# Altium PCB Sensor.PcbDoc
Units mil, origin at the board's own origin, x right, y up, seen from the top; angles counter-clockwise.
Board outline 6000 x 4000 mil, 2 copper layers (Top Layer, Bottom Layer); 43 components, 41 nets, 155 pads, 2 vias.
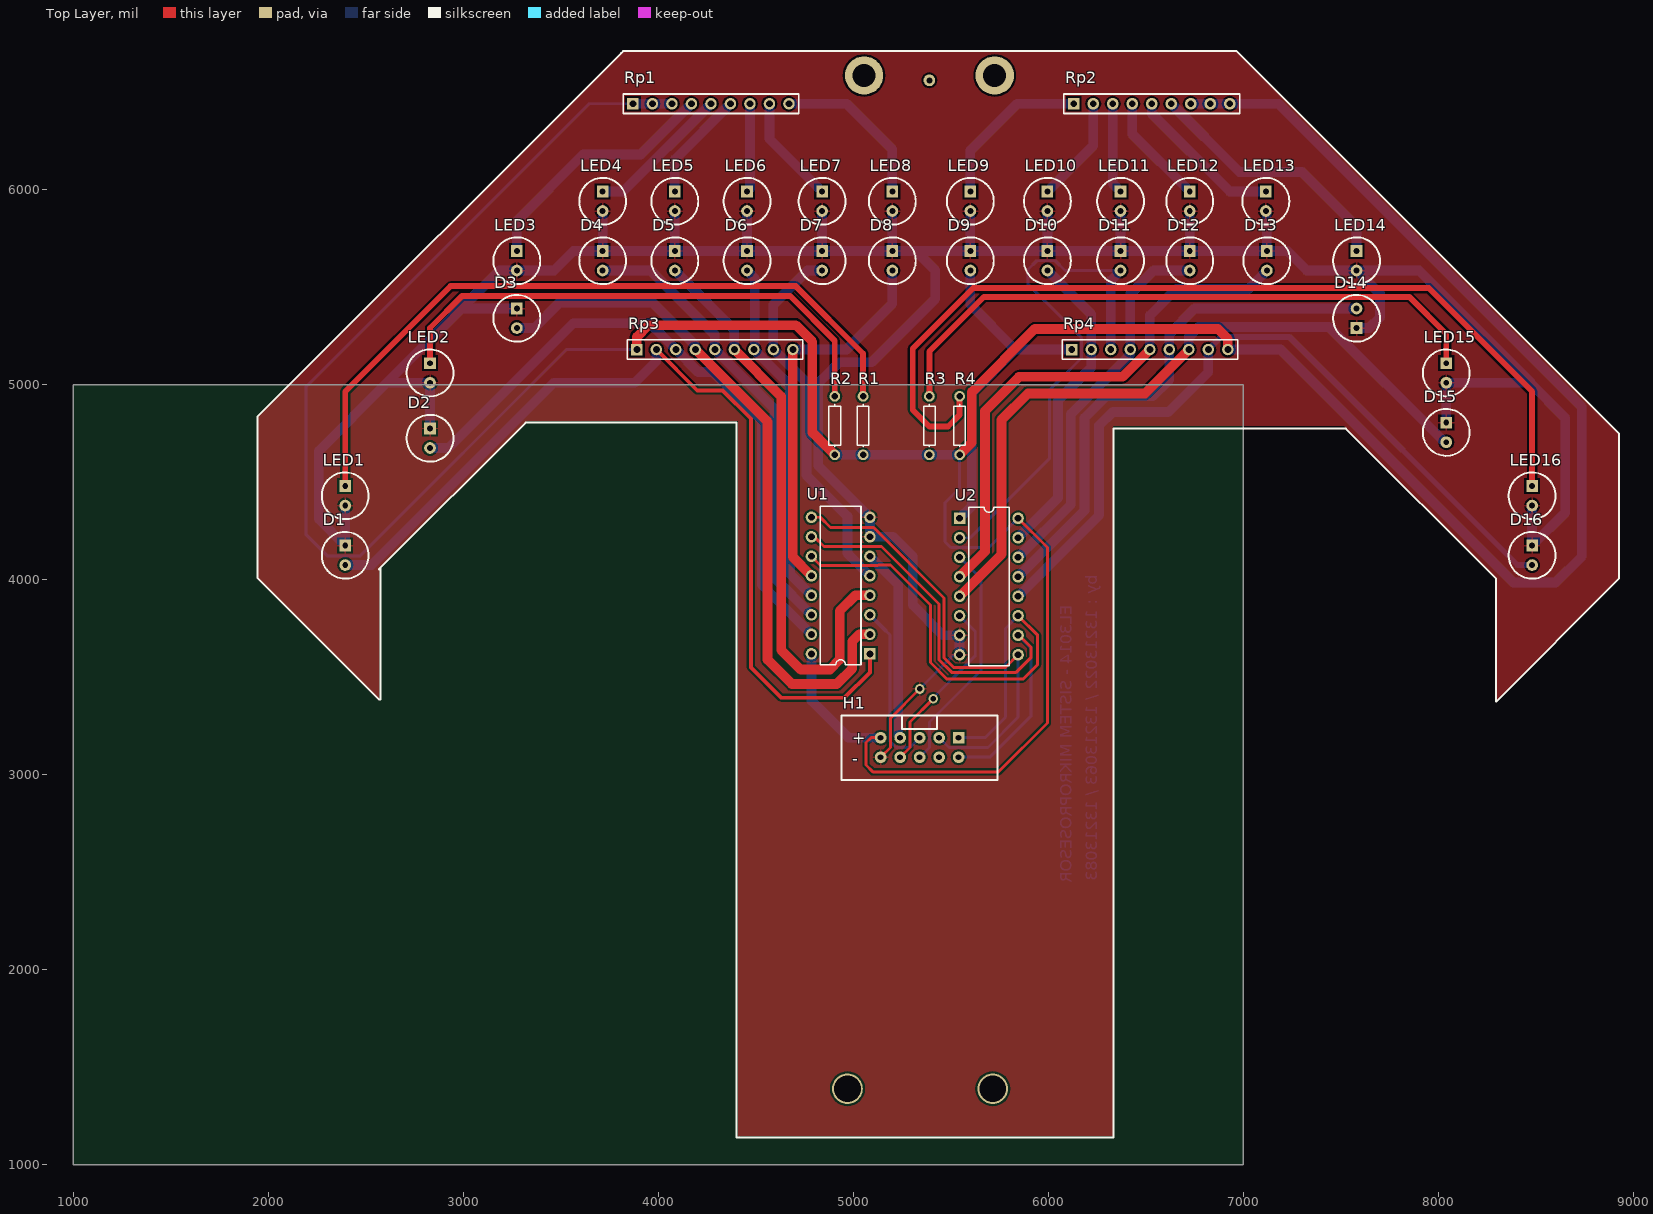
[diagram p0: Top Layer view]
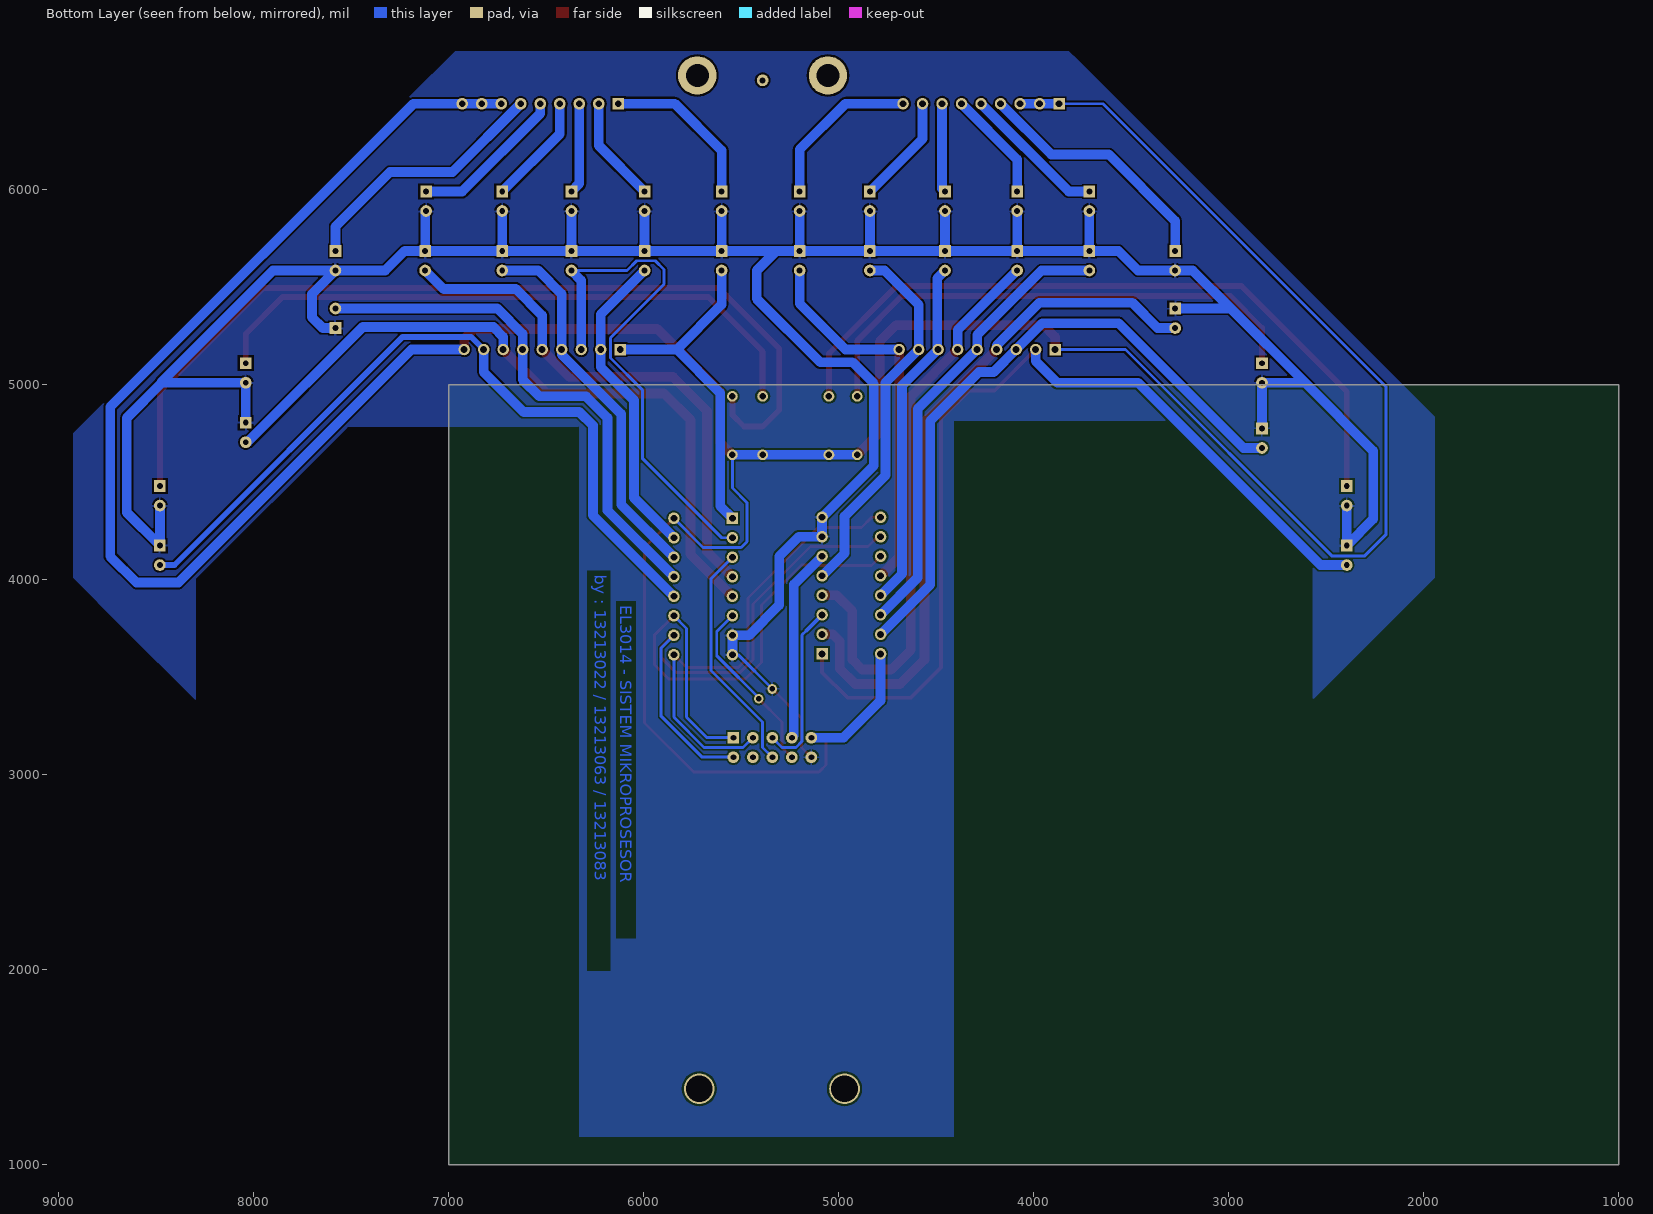
[diagram p1: Bottom Layer view, seen from below]

## Layer stack, top to bottom
Top Solder: solder mask 0.4, Solder Resist, Dk 3.5
Top Layer: signal copper 1.4
Dielectric 1: dielectric 12.6, FR-4, Dk 4.8
Bottom Layer: signal copper 1.4
Bottom Solder: solder mask 0.4, Solder Resist, Dk 3.5

## Board outline
1000,1000 7000,1000 7000,5000 1000,5000

## Design rules (kind name [scope] priority, off if disabled: settings)
Clearance Jalur [All] p1: gap=10
PolygonConnect [All] p1: connectstyle=Relief reliefconductorwidth=10 reliefentries=4 polygonreliefangle="90 Angle" airgapwidth=10
RoomDefinition Sensor [InComponentClass('Sensor')] p1: confinementstyle=ConfineIn formatcopy=TRUE lockcomponents=FALSE outline 1730,880 9160,880 9160,6790 1730,6790
RoutingVias [All] p1: holewidth=28 width=50 viastyle="Through Hole" minholewidth=28 minwidth=50 maxholewidth=28 maxwidth=50
SolderMaskExpansion [All] p1: expansion=4
Width Lebar [OnLayer()] p1: maxlimit=80 minlimit=10 preferedwidth=15
30 further rules are at their usual default settings.

## Components (designator, comment, footprint, x,y, rotation, side; value= is the part's Value field where it differs from the comment)
D1 "LED sedang" "LED sedang" 2395,3975 r270 top
D2 "LED sedang" "LED sedang" 2830,4575 r270 top
D3 "LED sedang" "LED sedang" 3275,5190 r270 top
D4 "LED sedang" "LED sedang" 3715,5485 r270 top
D5 "LED sedang" "LED sedang" 4085,5485 r270 top
D6 "LED sedang" "LED sedang" 4455,5485 r270 top
D7 "LED sedang" "LED sedang" 4840,5485 r270 top
D8 "LED sedang" "LED sedang" 5200,5485 r270 top
D9 "LED sedang" "LED sedang" 5600,5485 r270 top
D10 "LED sedang" "LED sedang" 5995,5485 r270 top
D11 "LED sedang" "LED sedang" 6370,5485 r270 top
D12 "LED sedang" "LED sedang" 6725,5485 r270 top
D13 "LED sedang" "LED sedang" 7120,5485 r270 top
D14 "LED sedang" "LED sedang" 7580,5490.13 r90 top
D15 "LED sedang" "LED sedang" 8040,4605 r270 top
D16 "LED sedang" "LED sedang" 8480,3975 r270 top
H1 "Header Soket male 10 pin" "Header Soket male 10 pin" 5440,3290 r180 top
LED1 "LED sedang" "LED sedang" 2395,4280 r270 top
LED2 "LED sedang" "LED sedang" 2830,4910 r270 top
LED3 "LED sedang" "LED sedang" 3275,5485 r270 top
LED4 "LED sedang" "LED sedang" 3715,5790 r270 top
LED5 "LED sedang" "LED sedang" 4085,5790 r270 top
LED6 "LED sedang" "LED sedang" 4455,5790 r270 top
LED7 "LED sedang" "LED sedang" 4840,5790 r270 top
LED8 "LED sedang" "LED sedang" 5200,5790 r270 top
LED9 "LED sedang" "LED sedang" 5600,5790 r270 top
LED10 "LED sedang" "LED sedang" 5995,5790 r270 top
LED11 "LED sedang" "LED sedang" 6370,5790 r270 top
LED12 "LED sedang" "LED sedang" 6725,5790 r270 top
LED13 "LED sedang" "LED sedang" 7115,5790 r270 top
LED14 "LED sedang" "LED sedang" 7580,5485 r270 top
LED15 "LED sedang" "LED sedang" 8040,4910 r270 top
LED16 "LED sedang" "LED sedang" 8480,4280 r270 top
R1 "Res1" AXIAL-0.3 5050,4790 r270 top
R2 "Res1" AXIAL-0.3 4905,4790 r270 top
R3 "Res1" AXIAL-0.3 5390,4790 r270 top
R4 "Res1" AXIAL-0.3 5545,4790 r270 top
Rp1 "Header 9" HDR1X9 3870,6440 r0 top
Rp2 "Header 9" HDR1X9 6130,6440 r0 top
Rp3 "Header 9" HDR1X9 3890,5180 r0 top
Rp4 "Header 9" HDR1X9 6120,5180 r0 top
U1 "HCC4051BF" DIP16 4935,3970 r90 top
U2 "HCC4051BF" DIP16 5695,3965 r270 top

## Footprints (in the part's own frame and the unit in brackets; to place one, negate y for a bottom-side part, rotate by r counter-clockwise, add the part's x,y. Pads: shape width x height; smd on the part's side, far side on the other; paste and mask are expansions set on the pad)
AXIAL-0.3 [mm] "Axial Device, Thru-Hole; 2 Leads; 0.3 in Pin Spacing"
  round 1.4 hole 0.85: 1(-3.81,0) 2(3.81,0)
  silkscreen extent -2.77,-0.76 2.77,0.76
DIP16 [mm] "DIP; 16 Leads; Row Spacing 7.62 mm; Pitch 2.54 mm"
  rect 1.5x1.5 hole 0.9: 1(-8.89,-3.81)
  round 1.5 hole 0.9: 2(-6.35,-3.81) 3(-3.81,-3.81) 4(-1.27,-3.81) 5(1.27,-3.81) 6(3.81,-3.81) 7(6.35,-3.81) 8(8.89,-3.81) 9(8.89,3.81) 10(6.35,3.81) 11(3.81,3.81) 12(1.27,3.81) 13(-1.27,3.81) 14(-3.81,3.81) 15(-6.35,3.81) 16(-8.89,3.81)
  silkscreen extent -10.3,-2.65 10.3,2.65
HDR1X9 [mm] "Connector; Header; 9 Position"
  rect 1.5x1.5 hole 0.9: 1(0,0)
  round 1.5 hole 0.9: 2(2.54,0) 3(5.08,0) 4(7.62,0) 5(10.16,0) 6(12.7,0) 7(15.24,0) 8(17.78,0) 9(20.32,0)
  silkscreen extent -1.27,-1.27 21.59,1.27
"Header Soket male 10 pin" [mil]
  rect 60x60 hole 30: 1(-100,100)
  round 60 hole 30: 2(-100,200) 3(0,100) 4(0,200) 5(100,100) 6(100,200) 7(200,100) 8(200,200) 9(300,100) 10(300,200)
  silkscreen extent -300,-14 500,316
"LED sedang" [mil]
  rect 60x60 hole 30: 1(-200,0)
  round 60 hole 30: 2(-100,0)
  silkscreen extent -270,-120 -30,120

## Part data
R1 R2 R3 R4: "Resistor"
Rp1 Rp2 Rp3 Rp4: "Header, 9-Pin"
U1 U2: "Analog Multiplexer/Demultiplexer"

## Free pads (board coordinates)
  round 60 hole 30: 1(5390,6560)
  round 157.48 hole 137.8: 2(5715,1390) 4(4970,1390)
  round 196.85 hole 118.11: 2(5725,6585) 3(5055,6585)

## Via types
v1: diameter 50, hole 28, Top Layer to Bottom Layer, 2 vias

## Nets (pads, with @x,y where several pads share a name; then routed paths per layer and width w, separated by ;. In a path a pad name is that pad's centre, name@x,y a point inside that pad or via, vN(x,y) a via of type N, cw(c..) or ccw(c..) an arc to the next point about the centre after c; other vN are vias at no path point)
A: H1.1 U1.11 U2.11 | length 2748.3
  Top Layer w15: U1.11 4832.03,4072.97 5127.03,4072.97 5129.06,4075 5190,4075 5395,3870 5395,3575 5480,3490 5870,3490 5945,3565 5945,3715 U2.11
  Bottom Layer w15: H1.1 5675,3190 5780,3295 5780,3750 U2.11
B: H1.2 U1.10 U2.10 | length 2654.9
  Top Layer w15: U1.10 4800,4220 4850,4170 5145,4170 5440,3875 5440,3589.64 5504.64,3525 5835,3525 5910,3600 5910,3655 5850,3715 U2.10
  Bottom Layer w15: H1.2 5700,3090 5910,3300 5910,3650 U2.10
C: H1.3 U1.9 U2.9 | length 2395.3
  Top Layer w15: U1.9 4830,4320 4882.97,4267.03 5104.48,4267.03 5465,3906.51 5465,3600 5515,3550 5780,3550 U2.9
  Bottom Layer w15: H1.3 5490,3140 5690,3140 5845,3295 U2.9
GND: D1.1 D2.1 D3.1 D4.1 D5.1 D6.1 D7.1 D8.1 D9.1 D10.1 D11.1 D12.1 D13.1 D14.1 D15.1 D16.1 H1.10 LED1.2 LED2.2 LED3.2 LED4.2 LED5.2 LED6.2 LED7.2 LED8.2 LED9.2 LED10.2 LED11.2 LED12.2 LED13.2 LED14.2 LED15.2 LED16.2 U1.7 U1.8 U2.7 U2.8 | length 16289.8
  Top Layer w15: H1.10 5190,3140 5190,3290 v1(5340,3440)
  Bottom Layer w15: v1(5340,3440) 5515,3615 U2.8
  Bottom Layer w50: LED1.2 D1.1 2260,4310 2260,4660 2610,5010 ; D2.1 LED2.2 2610,5010 ; D3.1 2990,5390 ; LED4.2 D4.1 ; LED5.2 D5.1 ; LED6.2 D6.1 ; LED7.2 D7.1 ; LED8.2 D8.1 ; U2.8 U2.7 5460,3715 5305,3870 5305,4120 5205,4220 U1.7 U1.8 4820,4585 4820,5005 4930,5115 5095,5115 5420,5440 5420,5585 5320,5685 ; LED9.2 D9.1 ; LED10.2 D10.1 ; LED11.2 D11.1 ; LED12.2 D12.1 ; LED13.2@7120,5885 D13.1 ; D14.1 7645.13,5290.13 7700,5345 7700,5465 LED14.2 ; D15.1 LED15.2 8470,5010 ; LED16.2 D16.1 8650,4345 8650,4830 8470,5010 ; 2610,5010 2990,5390 ; 2990,5390 3185,5585 LED3.2 3465,5585 3565,5685 D4.1 ; D4.1 D5.1 ; D5.1 D6.1 ; D6.1 D7.1 ; D7.1 D8.1 ; D8.1 5320,5685 ; 5320,5685 D9.1 ; D9.1 D10.1 ; D10.1 D11.1 ; D11.1 D12.1 ; D12.1 D13.1 ; D13.1 7225,5685 7325,5585 LED14.2 ; LED14.2 7900,5585 8472.5,5012.5 8470,5010
INH1: H1.7 U1.6 | length 994.2
  Bottom Layer w50: U1.6 5230,3975 5230,3200 H1.7
INH2: H1.8 U2.6 | length 933.8
  Top Layer w15: H1.8 5290,3140 5290,3270 v1(5410,3390)
  Bottom Layer w15: v1@5395,3380 5625,3610 5625,3735 U2.6
IO1: H1.5 U1.3 | length 877
  Bottom Layer w15: 5165,3740 5187.5,3717.5 5187.5,3171.79 5219.29,3140 5290,3140 H1.5
  Bottom Layer w20: U1.3 5165,3740
IO2: H1.6 U2.3 | length 1201
  Bottom Layer w15: H1.6 5390,3140 5390,3270 5655,3535 5655,4005 U2.3
NetLED1_1: LED1.1 R1.1 | length 3726.6
  Top Layer w30: LED1.1 2395,4965 2935,5505 4705,5505 5050,5160 R1.1
NetLED2_1: LED2.1 R2.1 | length 2703.6
  Top Layer w30: LED2.1 2830,5290 2995,5455 4675,5455 4905,5225 R2.1
NetLED3_1: LED3.1 Rp1.4 | length 1298.5
  Bottom Layer w50: LED3.1 3275,5840 3615,6180 3910,6180 Rp1.4
NetLED4_1: LED4.1 Rp1.5 | length 741.4
  Bottom Layer w50: LED4.1 3820,5990 Rp1.5
NetLED5_1: LED5.1 Rp1.6 | length 568.1
  Bottom Layer w50: LED5.1 4085,6155 Rp1.6
NetLED6_1: LED6.1 Rp1.7 | length 456.2
  Bottom Layer w50: LED6.1 4470,6005 Rp1.7
NetLED7_1: LED7.1 Rp1.8 | length 561.8
  Bottom Layer w50: Rp1.8 4570,6260 LED7.1
NetLED8_1: LED8.1 Rp1.9 | length 842.3
  Bottom Layer w50: Rp1.9 4965,6440 5200,6205 LED8.1
NetLED9_1: LED9.1 Rp2.1 | length 839.4
  Bottom Layer w50: LED9.1 5600,6200 5840,6440 Rp2.1
NetLED10_1: LED10.1 Rp2.2 | length 547.3
  Bottom Layer w50: LED10.1 6230,6225 Rp2.2
NetLED11_1: LED11.1 Rp2.3 | length 466.6
  Bottom Layer w50: Rp2.3 6330,6030 LED11.1
NetLED12_1: LED12.1 Rp2.4 | length 572.2
  Bottom Layer w50: Rp2.4 6430,6285 LED12.1
NetLED13_1: LED13.1 Rp2.5 | length 800.7
  Bottom Layer w50: Rp2.5 6530,6390 6930,5990 LED13.1
NetLED14_1: LED14.1 Rp2.6 | length 1336
  Bottom Layer w50: Rp2.6 6980,6090 7300,6090 7580,5810 LED14.1
NetLED15_1: LED15.1 R3.1 | length 3224.7
  Top Layer w30: R3.1 5390,5170 5670,5450 7850,5450 8040,5260 LED15.1
NetLED16_1: LED16.1 R4.1 | length 4718
  Top Layer w30: R4.1 5545,4845 5485,4785 5390,4785 5305,4870 5305,5185 5615,5495 7950,5495 8480,4965 LED16.1
S1: D1.2 Rp3.2 U1.1 | length 4827.9
  Top Layer w20: Rp3.2@4000,5180 Rp3.2 4200,4970 4330,4970 4475,4825 4475,3550 4630,3395 4955,3395 5085,3525 U1.1
  Bottom Layer w50: D1.2 2530,4075 3465,5010 3880,5010 3990,5120 Rp3.2
S2: D2.2 Rp3.3 U1.15 | length 3372.8
  Bottom Layer w50: D2.2 2925,4675 3565,5315 3955,5315 Rp3.3 4205,5065 4280,5065 4530,4815 4530,3975 U1.15
S3: D3.2 Rp3.4 U1.2 | length 3587.6
  Top Layer w50: Rp3.4 4560,4810 4560,3590 4685,3465 4915,3465 4995,3545 4995,3685 5030,3720 U1.2
  Bottom Layer w50: D3.2 3365,5290 3495,5420 3970,5420 4190,5200 Rp3.4
S4: D4.2 Rp3.5 U1.14 | length 2351.7
  Bottom Layer w50: D4.2 3960,5585 4290,5255 Rp3.5 4595,4875 4595,4010 U1.14
S5: D5.2 Rp3.6 U1.4 | length 2971
  Top Layer w50: Rp3.6 4630,4940 4630,3640 4730,3540 4880,3540 4930,3590 4930,3840 5010,3920 U1.4
  Bottom Layer w50: D5.2 4390,5280 Rp3.6
S6: D6.2 Rp3.7 U1.13 | length 1805.8
  Bottom Layer w50: D6.2 4495,5545 4495,5185 Rp3.7 4675,4995 4675,4030 U1.13
S7: D7.2 Rp3.8 U1.5 | length 1917.5
  Bottom Layer w50: D7.2 4765,5585 4590,5410 Rp3.8 4760,5010 4760,4535 4970,4325 4970,4135 U1.5
S8: D8.2 Rp3.9 U1.12 | length 1976.7
  Top Layer w50: Rp3.9 4690,4115 U1.12
  Bottom Layer w50: Rp3.9 4965,5180 5200,5415 D8.2
S9: D9.2 Rp4.1 U2.1 | length 1773.3
  Bottom Layer w50: U2.1 5607.56,4377.56 5607.56,4957.56 5830,5180 ; D9.2 5600,5410 5830,5180 ; Rp4.1 5830,5180
S10: D10.2 Rp4.2 U2.15 | length 1618.5
  Bottom Layer w50: U2.15 6050,4420 6050,4920 6220,5090 Rp4.2 6220,5360 D10.2
S11: D11.2 Rp4.3 U2.2 | length 2720.1
  Bottom Layer w15: U2.2 5600,4215 6005,4620 6005,4970.94 6170,5135.94 6170,5240 5895,5515 5895,5590 5940,5635 6035,5635 6085,5585 D11.2
  Bottom Layer w50: Rp4.3 6320,5535 D11.2
S12: D12.2 Rp4.4 U2.14 | length 1942.9
  Bottom Layer w50: U2.14 6115,4385 6115,4850 6420,5155 Rp4.4 6420,5465 6540,5585 D12.2
S13: D13.2 Rp4.5 U2.4 | length 2749.6
  Top Layer w50: U2.4 5675,4145 5675,4865 5850,5040 6380,5040 Rp4.5
  Bottom Layer w50: Rp4.5 6520,5355 6655,5490 7025,5490 D13.2
S14: D14.2 Rp4.6 U2.13 | length 2720.5
  Bottom Layer w50: U2.13 6185,4355 6185,4830 6295,4940 6535,4940 6620,5025 Rp4.6 6620,5260 6750.13,5390.13 D14.2
S15: D15.2 Rp4.7 U2.5 | length 3753.3
  Top Layer w50: U2.5 5760,4130 5760,4820 5895,4955 6495,4955 Rp4.7
  Bottom Layer w15: D15.2@8030,4705 D15.2
  Bottom Layer w50: Rp4.7 6720,5245 6770,5295 7440,5295 D15.2@8030,4705
S16: D16.2 Rp4.8 U2.12 | length 4007.4
  Bottom Layer w30: Rp4.8 6885,5245 7235,5245 8405,4075 D16.2
  Bottom Layer w50: U2.12 6260,4330 6260,4790 6330,4860 6615,4860 6820,5065 Rp4.8
VCC: H1.9 R1.2 R2.2 R3.2 R4.2 Rp1.1 Rp1.2 Rp1.3 Rp2.7 Rp2.8 Rp2.9 Rp3.1 Rp4.9 U1.16 U2.16 | length 19315.9
  Top Layer w15: H1.9 5090,3190 5065,3165 5065,3050 5100,3015 5745,3015 5995,3265 5995,4165 U2.16
  Top Layer w50: Rp3.1 3890,5245 3950,5305 4705,5305 4790,5220 4790,4755 R2.2 ; R4.2 5607.56,4702.56 5607.56,4962.56 5930,5285 6870,5285 6920,5235 Rp4.9
  Bottom Layer w15: Rp1.1 3645,6440 2195,4990 2195,4230 2302.5,4122.5 2472.5,4122.5 3530,5180 Rp3.1 ; R4.2 5545,4470 5470,4395 5470,4195 5500,4165 5695,4165 U2.16
  Bottom Layer w50: Rp1.1 Rp1.2 Rp1.3 ; U1.16 4785,3380 4975,3190 H1.9 ; R2.2 R1.2 R3.2 R4.2 ; Rp2.7 Rp2.8 Rp2.9 7180,6440 8735,4885 8735,4120 8600,3985 8385,3985 7190,5180 Rp4.9
pads on no net: H1.4

## Polygon pours and split planes (outlines as drawn)
GND on Top Layer "Bottom Layer-No Net" (solid, pour order 4): 2570,3385 2570,4055 2570,4060 3325,4815 4410,4815 4410,1140 4420,1150 6330,1150 6330,4785 6335,4790 7520,4790 7520,4785 8300,4005 8300,3375 8300,3380 8925,4005 8925,4750 8920,4750 6960,6710 3820,6710 3820,6705 1950,4835 1945,4830 1945,4005 1950,4005 2570,3385
GND on Bottom Layer "Bottom Layer-No Net" (solid, pour order 6): 2570,3385 2570,4055 2570,4060 3325,4815 4410,4815 4410,1145 6330,1145 6330,4790 6335,4785 7520,4785 7520,4780 8295,4005 8295,3380 8675,3760 8925,4010 8925,4750 8915,4760 6965,6710 6820,6710 3820,6710 3775,6665 1945,4835 1945,4815 1945,4010 1950,4005 2570,3385 2575,3380

## Other copper
Bottom Layer:
  text "by : 13213022 / 13213063 / 13213083" at 6250,4025 h60 r90
  text "EL3014 - SISTEM MIKROPROSESOR" at 6120,3870 h60 r90

## Silkscreen, mask and mechanical layers (free items; w line width, h text height)
Top Overlay:
  lines w10: 1945,4015 1945,4010 ; 2567.5,4052.5 3320,4805 4400,4805 4400,1290 4400,1140 4475,1140 6290,1140 6330,1140 ; 2575,4060 2575,3385 2570,3385 2480,3475 1945,4010 ; 6335,1140 6335,1290 6335,1360 6335,4775 6475,4775 7525,4775 8295,4005 8295,3375 8910,3990 8925,4005 8925,4750 6965,6710 3820,6710 3810,6700 1945,4835 1945,4010
  text "+" at 4995,3160 h60
  text "-" at 4995,3055 h60

## Dimensions
1945,3935 to 8930,3905 on Top Overlay
4970,1390 to 5715,1390 on Top Overlay
4400,1070 to 6340,1070 on Top Overlay